# Altium PCB STM_System_Board.PCBDOC (part 10 of 16)
Units mm, origin at the board's own origin, x right, y up, seen from the top; angles counter-clockwise.
Board outline 222.53 x 100.01 mm, 6 copper layers (Top Layer, Int1 (GND), Int2 (Sign), Layer 1, Layer 2, Bottom Layer), stack 1.526 mm thick; 702 components, 774 nets, 3596 pads, 1988 vias.
Unrouted connection lines stored in the file: 1.
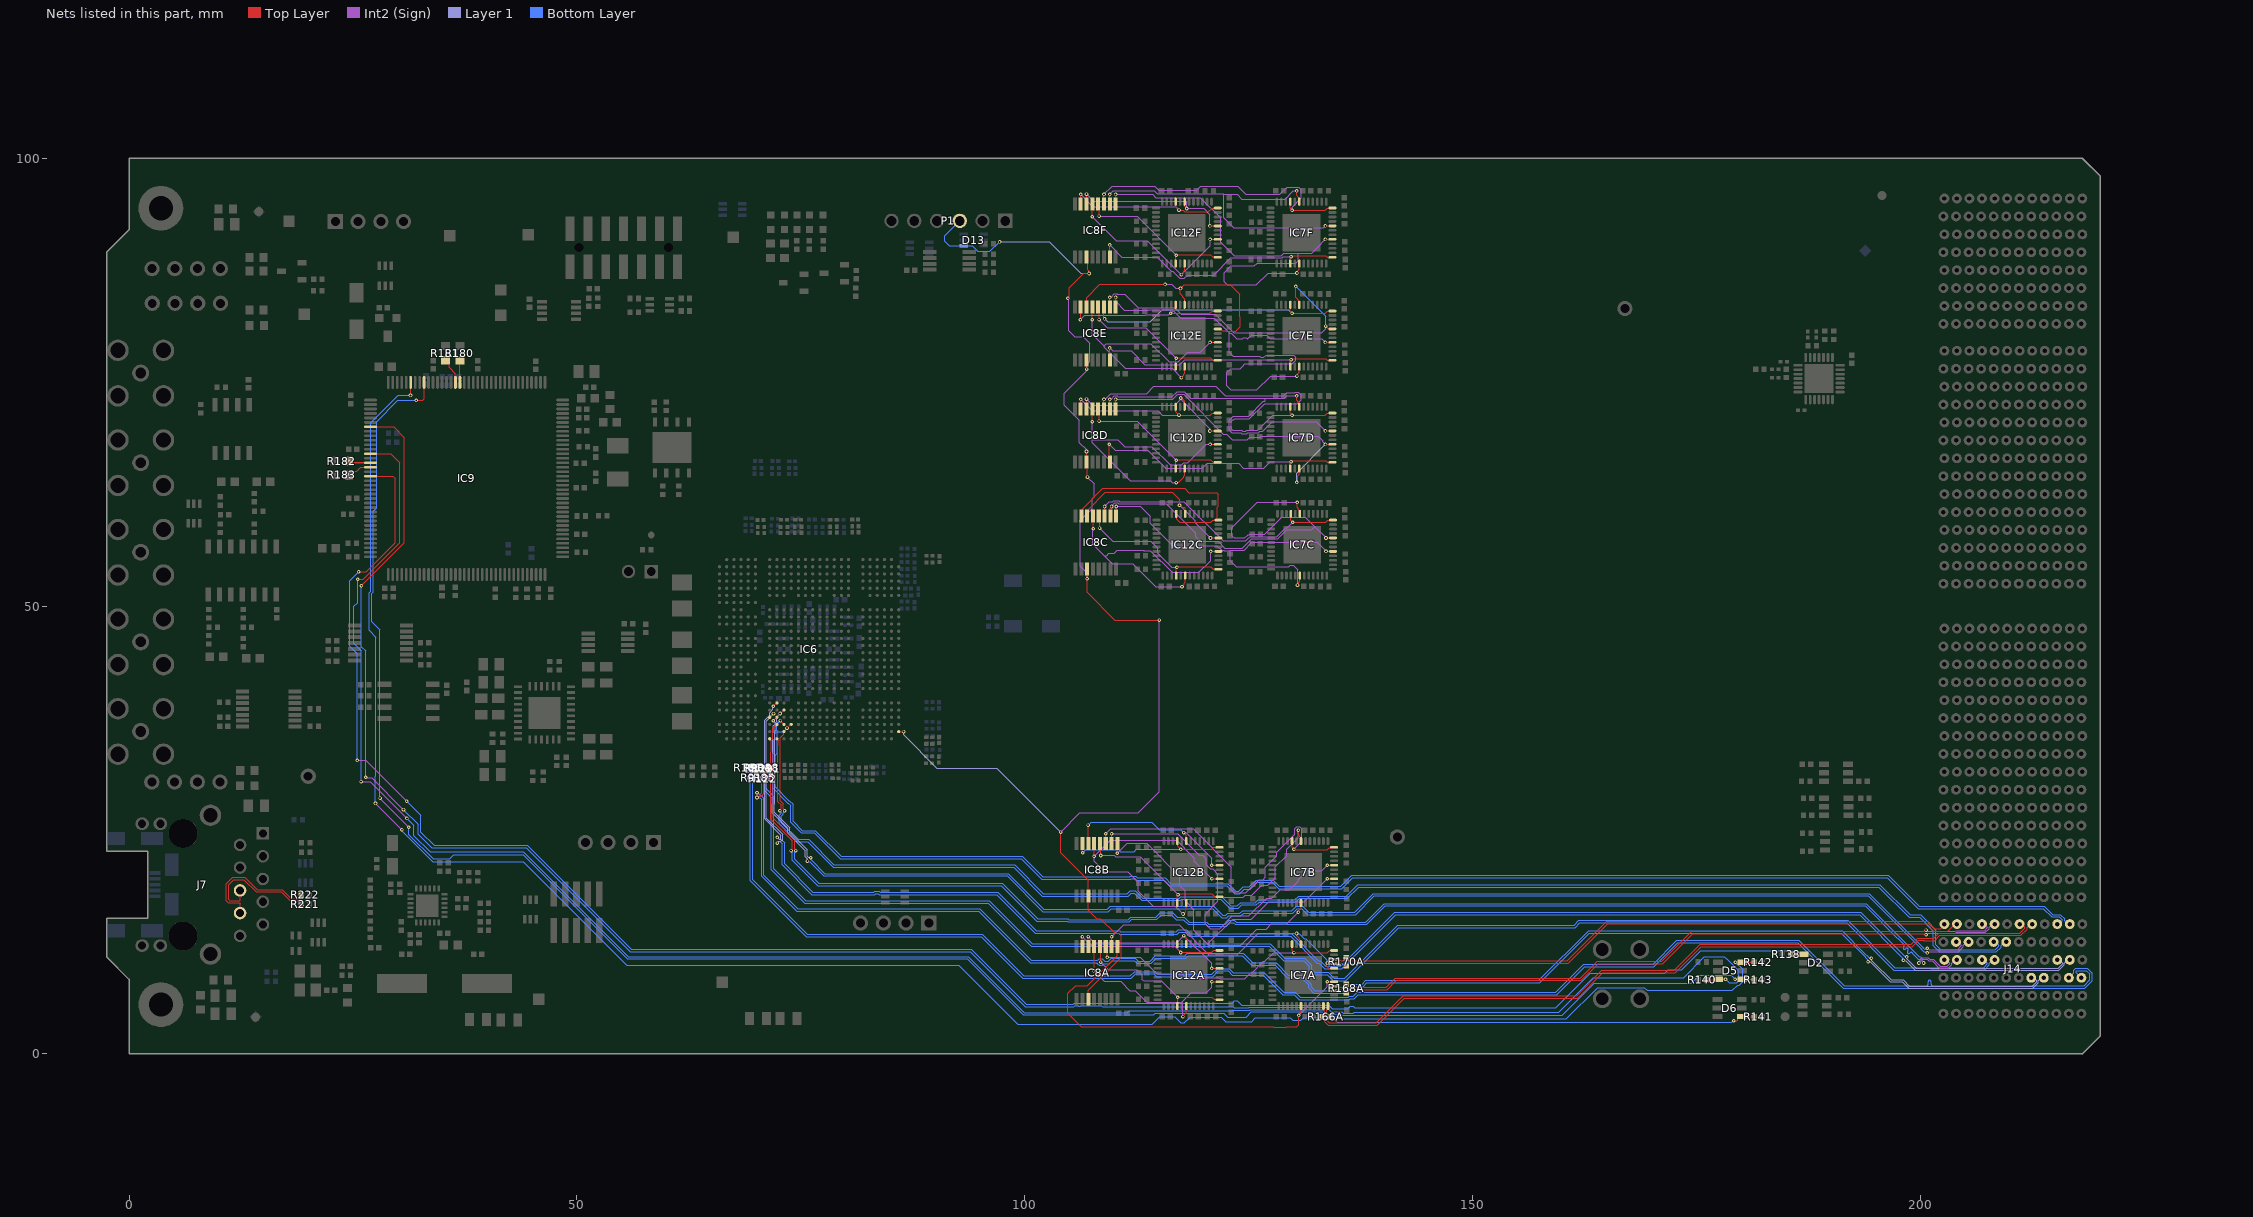
[diagram p13: the nets of this part, all layers, seen from the top]

## Via types
v1: diameter 0.4, hole 0.2, Top Layer to Bottom Layer, tented both sides, 1806 vias
v2: diameter 0.7, hole 0.4, Top Layer to Bottom Layer, tented both sides, 92 vias
v3: diameter 0.7, hole 0.4, Top Layer to Bottom Layer, 90 vias

## Nets (pads, with @x,y where several pads share a name; then routed paths per layer and width w, separated by ;. In a path a pad name is that pad's centre, name@x,y a point inside that pad or via, vN(x,y) a via of type N, cw(c..) or ccw(c..) an arc to the next point about the centre after c; other vN are vias at no path point) (continued)
R\E\_DE8D: IC7D.1 IC7D.40 IC8D.15 | length 29.6
  Top Layer w0.127: v1(109.427,68.048) 109.423,68.044 109.423,66.15 IC8D.15@109.479,66.094 ; IC7D.40@129.629,65.344 129.629,66.022 v1(129.715,66.108) 129.801,66.194 133.589,66.194 133.739,66.044 IC7D.1@134.329,66.044
  Int2 (Sign) w0.127: v1(109.427,68.048) 110.1,67.375 113.7,67.375 115.7,65.375 119.8,65.375 120.335,65.91 123.896,65.91 124.402,65.404 126.669,65.404 127.374,66.108 v1(129.715,66.108)
R\E\_DE8E: IC7E.1 IC7E.40 IC8E.15 | length 28.1
  Top Layer w0.127: IC8E.15@109.479,77.479 v1(109.479,78.808) ; IC7E.40@129.629,76.729 129.629,77.407 v1(129.715,77.493) 129.801,77.579 133.589,77.579 133.739,77.429 IC7E.1@134.329,77.429
  Int2 (Sign) w0.127: v1(109.479,78.808) 109.789,78.498 111.854,78.498 113.402,76.95 117.314,76.95 117.858,77.493 v1(129.715,77.493)
R\E\_DE8F: IC7F.1 IC7F.40 IC8F.15 | length 29.6
  Top Layer w0.127: IC8F.15@109.479,88.979 v1(109.479,90.308) ; IC7F.40@129.629,88.229 129.629,88.907 v1(129.715,88.993) 129.801,89.079 133.589,89.079 133.739,88.929 IC7F.1@134.329,88.929
  Int2 (Sign) w0.127: v1(109.479,90.308) 110.837,88.95 114.775,88.95 116.341,87.384 116.526,87.384 117.307,86.604 117.816,86.604 118.152,86.94 121.069,86.94 123,88.871 128.74,88.871 128.863,88.993 v1(129.715,88.993)
R\E\_DE9A: IC7A.5 IC7A.42 IC8A.1 | length 45.1
  Top Layer w0.127: IC8A.1@110.325,12.006 110.325,10.975 106.95,7.6 105.65,7.6 104.8,6.75 104.8,4.55 106.3,3.05 127.714,3.05 127.792,2.972 129.195,2.972 129.249,3.025 130.325,3.025 130.565,3.265 v1(130.565,4.298) 130.64,4.373 130.64,4.531 130.825,4.716 IC7A.42@130.825,5.356 ; v1(133.748,8.056) IC7A.5@134.525,8.056
  Int2 (Sign) w0.127: v1(130.565,4.298) 133.748,7.481 v1(133.748,8.056)
R\E\_DE9B: IC7B.5 IC7B.42 IC8B.1 | length 48.9
  Top Layer w0.127: v1(110.3,22.4) 110.325,22.425 IC8B.1@110.325,23.506 ; v1(130.536,15.827) 130.536,15.901 130.635,16 130.635,16.026 130.825,16.216 IC7B.42@130.825,16.856 ; v1(133.748,19.556) IC7B.5@134.525,19.556
  Int2 (Sign) w0.127: v1(110.3,22.4) 111.4,23.5 113.6,23.5 117.3,19.8 117.3,18.8 117.875,18.225 117.875,17.124 118.875,16.124 118.875,13.8 120.525,12.15 124.1,12.15 125.875,13.925 126.925,13.925 127.525,14.525 129.234,14.525 v1(130.536,15.827) ; 120.437,12.287 123.2,15.05 125.275,15.05 127.225,17 131.191,17 v1(133.748,19.556)
R\E\_DE9C: IC7C.5 IC7C.42 IC8C.1 | length 40.7
  Top Layer w0.127: IC8C.1@110.194,60.046 110.202,60.054 v1(110.202,61.113) ; v1(130.434,52.338) 130.509,52.413 130.509,52.571 130.694,52.756 IC7C.42@130.694,53.396 ; v1(133.617,56.096) IC7C.5@134.394,56.096
  Int2 (Sign) w0.127: v1(110.202,61.113) 112.877,61.113 113.995,59.995 113.995,59.233 116.484,56.744 121.431,56.744 121.95,56.225 122.181,56.225 122.235,56.171 122.855,56.171 122.9,56.216 ; v1(130.434,52.338) 130.434,54.059 129.942,54.551 129.618,54.551 129.442,54.375 123.6,54.375 122.9,55.075 122.9,56.216 ; v1(133.617,56.096) 132.618,57.095 125.35,57.095 124.471,56.216 122.9,56.216
R\E\_DE9D: IC7D.5 IC7D.42 IC8D.1 | length 35.4
  Top Layer w0.127: IC8D.1@110.129,71.994 v1(110.129,73.061) ; v1(130.35,63.8) 130.35,63.874 130.444,63.968 130.444,64.519 130.629,64.704 IC7D.42@130.629,65.344 ; v1(133.552,68.044) IC7D.5@134.329,68.044
  Int2 (Sign) w0.127: v1(110.129,73.061) 116.483,73.061 117.047,73.625 117.725,73.625 122.157,69.193 122.554,69.193 123.172,68.575 124.83,68.575 125.101,68.846 126.298,68.846 126.407,68.954 132.642,68.954 132.704,68.892 132.786,68.892 133.252,68.427 133.252,68.355 133.552,68.055 v1(133.552,68.044)
  Layer 1 w0.127: v1(130.35,63.8) 130.35,64.843 v1(133.552,68.044)
R\E\_DE9E: IC7E.5 IC7E.42 IC8E.1 | length 57.9
  Top Layer w0.127: IC8E.1@110.129,83.379 v1(110.129,84.446) ; v1(130.369,75.671) 130.444,75.746 130.444,75.904 130.629,76.089 IC7E.42@130.629,76.729 ; v1(133.552,79.429) IC7E.5@134.329,79.429
  Int2 (Sign) w0.127: v1(110.129,84.446) 110.129,84.025 111.114,83.039 113.774,83.039 113.8,83.066 116.459,83.066 117.374,82.151 121.152,82.151 122.802,80.502 ; v1(130.369,75.671) 127.421,75.671 125.9,74.15 123,74.15 122.55,74.6 122.55,76.075 122.975,76.5 124.05,76.5 124.309,76.76 124.309,76.792 124.538,77.021 124.571,77.021 124.604,77.054 129.828,77.054 130.225,77.451 130.225,77.775 130,78 126.923,78 126.673,77.751 126.35,77.751 126.213,77.887 123.325,77.887 123.263,77.887 122.802,78.348 122.802,80.502 ; v1(133.552,79.429) 133.131,79.85 127.413,79.85 127.01,80.254 125.306,80.254 124.902,79.85 124.804,79.85 124.714,79.941 124.39,79.941 124.3,79.85 123.641,79.85 123.063,80.428 122.875,80.428 122.802,80.502
R\E\_DE9F: IC7F.5 IC7F.42 IC8F.1 | length 51.1
  Top Layer w0.127: IC8F.1@110.129,94.879 v1(110.129,95.946) ; v1(130.369,87.171) 130.444,87.246 130.444,87.404 130.629,87.589 IC7F.42@130.629,88.229 ; v1(133.552,90.929) IC7F.5@134.329,90.929
  Int2 (Sign) w0.127: v1(110.129,95.946) 114.254,95.946 114.625,95.575 119.6,95.575 121.85,93.325 121.85,90.625 123.35,89.125 128.635,89.125 128.894,89.384 130.525,89.384 ; v1(130.369,87.171) 127.146,87.171 125.825,85.85 122.6,85.85 122.25,86.2 122.25,87.225 123,87.975 125.625,87.975 125.925,88.275 130.25,88.275 130.525,88.55 130.525,89.384 ; v1(133.552,90.929) 133.099,90.477 133.099,90.454 132.029,89.384 130.525,89.384
R\E\_DE10A: IC7A.8 IC7A.19 IC8A.2 | length 32.4
  Top Layer w0.127: IC8A.2@109.675,12.006 v1(109.675,13.073) ; v1(130.325,13.45) 130.356,13.419 130.356,13.182 130.579,12.959 ; 130.579,12.958 130.64,12.897 130.64,12.788 130.825,12.603 IC7A.19@130.825,12.256 ; v1(133.75,10.15) 133.75,10.076 133.625,9.951 133.625,9.825 133.894,9.556 IC7A.8@134.525,9.556
  Int2 (Sign) w0.127: v1(109.675,13.073) 111.036,14.434 117.216,14.434 120.55,11.1 123.725,11.1 126.075,13.45 v1(130.325,13.45)
  Bottom Layer w0.127: v1(130.325,13.45) 130.35,13.425 130.599,13.425 131.179,12.845 131.33,12.845 133.738,10.437 133.738,10.162 v1(133.75,10.15)
R\E\_DE10B: IC7B.8 IC7B.19 IC8B.2 | length 53.9
  Top Layer w0.127: IC8B.2@109.675,23.506 v1(109.675,24.573) ; v1(130.536,24.969) 130.536,24.501 130.64,24.397 130.64,24.288 130.825,24.103 IC7B.19@130.825,23.756 ; v1(133.748,21.056) IC7B.8@134.525,21.056
  Int2 (Sign) w0.127: v1(109.675,24.573) 117.048,24.573 119.44,22.182 119.828,22.182 120.261,21.749 120.261,21.095 120.693,20.663 120.959,20.663 121.55,20.072 121.55,17.5 ; v1(130.536,24.969) 130.536,24.136 129.225,22.825 129.225,22.15 127.95,20.875 127.95,19.675 127.125,18.85 126.45,18.85 125.297,17.697 124.598,17.697 124.401,17.5 121.55,17.5 ; v1(133.748,21.056) 133.116,20.425 131.467,20.425 130.494,19.452 130.494,19.294 129.512,18.312 128.487,18.312 127.575,17.4 126.975,17.4 125,15.425 123.15,15.425 121.725,14 120.675,14 120.125,14.55 120.125,15.6 121.55,17.025 121.55,17.5
R\E\_DE10C: IC7C.8 IC7C.19 IC8C.2 | length 51.4
  Top Layer w0.127: IC8C.2@109.544,60.046 109.544,60.913 109.675,61.044 v1(109.675,61.113) ; v1(130.405,61.566) 130.405,61.041 130.509,60.937 130.509,60.828 130.694,60.643 IC7C.19@130.694,60.296 ; v1(133.617,57.596) IC7C.8@134.394,57.596
  Int2 (Sign) w0.127: v1(109.675,61.113) 109.675,61.139 110.04,61.504 110.364,61.504 110.476,61.392 115.8,61.392 119.064,58.128 119.064,57.714 119.575,57.203 121.562,57.203 122.295,56.47 124.27,56.47 125.3,57.5 128.225,57.5 129.225,58.5 132,58.5 132.356,58.856 ; v1(130.405,61.566) 129.937,61.566 129.93,61.56 125.91,61.56 123.1,58.75 123.1,57.85 123.35,57.6 124.55,57.6 124.925,57.975 125.057,57.975 125.09,58.008 126.783,58.008 128.7,59.925 131.288,59.925 132.356,58.856 ; v1(133.617,57.596) 132.356,58.856
R\E\_DE10D: IC7D.8 IC7D.19 IC8D.2 | length 43.1
  Top Layer w0.127: IC8D.2@109.479,71.994 v1(109.479,73.061) ; v1(130.34,73.457) 130.34,72.989 130.444,72.885 130.444,72.776 130.629,72.591 IC7D.19@130.629,72.244 ; v1(133.552,69.544) IC7D.8@134.329,69.544
  Int2 (Sign) w0.127: v1(109.479,73.061) 109.553,73.061 109.653,73.162 109.677,73.162 109.967,73.452 110.291,73.452 110.393,73.35 116.413,73.35 116.988,73.925 117.784,73.925 118.509,73.2 126.85,73.2 ; v1(130.34,73.457) 129.228,73.457 128.971,73.2 126.85,73.2 ; v1(133.552,69.544) 132.521,70.575 127.625,70.575 126.55,69.5 126.234,69.5 126.088,69.354 124.89,69.354 124.767,69.231 124.233,69.231 124.11,69.354 123.111,69.354 122.796,69.669 122.796,70.725 123.271,71.2 124.965,71.2 126.619,72.854 126.776,72.854 126.85,72.928 126.85,73.2
R\E\_DE10E: IC7E.8 IC7E.19 IC8E.2 | length 36.5
  Top Layer w0.127: IC8E.2@109.479,83.379 v1(109.479,84.446) ; v1(130.226,85.674) 130.226,84.488 130.444,84.27 130.444,84.161 130.629,83.976 IC7E.19@130.629,83.629 ; v1(133.575,81.25) 133.862,80.963 134.296,80.963 IC7E.8@134.329,80.929
  Int2 (Sign) w0.127: v1(109.479,84.446) 109.553,84.446 109.653,84.547 109.677,84.547 109.967,84.837 110.291,84.837 110.328,84.8 111.175,84.8 112.655,83.32 116.094,83.32 116.705,83.32 117.45,82.575 121.275,82.575 123.325,80.525 133.147,80.525 133.574,80.952 v1@133.574,81.249
  Bottom Layer w0.127: v1(130.226,85.674) 130.662,85.238 130.662,85.23 130.891,85.001 130.899,85.001 133.575,82.325 v1(133.575,81.25)
R\E\_DE10F: IC7F.8 IC7F.19 IC8F.2 | length 39.4
  Top Layer w0.127: IC8F.2@109.479,94.879 v1(109.479,95.946) ; v1(130.34,96.342) 130.34,95.874 130.444,95.77 130.444,95.661 130.629,95.476 IC7F.19@130.629,95.129 ; v1(133.552,92.429) IC7F.8@134.329,92.429
  Int2 (Sign) w0.127: v1(109.479,95.946) 109.869,96.337 114.438,96.337 114.775,96 122.145,96 122.2,95.945 ; v1@130.266,96.342 129.967,96.342 129.05,95.425 124.2,95.425 123.68,95.945 122.2,95.945 ; v1(133.552,92.429) 133.52,92.429 133.337,92.246 123.304,92.246 122.2,93.35 122.2,95.945
R\E\_DE11A: IC7A.12 IC7A.21 IC8A.3 | length 30
  Top Layer w0.127: IC8A.3@109.025,12.006 109.186,11.845 109.186,10.789 v1(109.2,10.775) ; IC7A.21@129.825,12.256 129.825,11.511 v1(130.026,11.31) 133.734,11.31 133.947,11.523 134.492,11.523 IC7A.12@134.525,11.556
  Int2 (Sign) w0.127: v1(109.2,10.775) 112.875,10.775 114.7,8.95 117.575,8.95 118.025,8.5 121.6,8.5 121.725,8.375 124.526,8.375 125.126,8.975 125.25,8.975 126.629,10.354 126.802,10.354 127.758,11.31 v1(130.026,11.31)
R\E\_DE11B: IC7B.12 IC7B.21 IC8B.3 | length 40.2
  Top Layer w0.127: IC8B.3@109.025,23.506 v1(109.025,24.573) ; IC7B.21@129.825,23.756 129.825,23.011 129.98,22.857 v1(130.027,22.857) ; v1@130.027,22.81 133.734,22.81 133.947,23.023 134.492,23.023 IC7B.12@134.525,23.056
  Int2 (Sign) w0.127: v1(109.025,24.573) 109.579,25.127 118.773,25.127 123.05,20.85 123.05,18.4 123.475,17.975 124.675,17.975 126.171,19.471 126.584,19.471 126.813,19.7 126.813,20.813 128.1,22.1 128.1,22.5 130.146,24.546 130.146,25.131 130.375,25.36 130.698,25.36 130.927,25.131 130.927,23.757 v1(130.027,22.857)
R\E\_DE11C: IC7C.12 IC7C.21 IC8C.3 | length 30.7
  Top Layer w0.127: IC8C.3@108.894,60.046 v1(108.894,61.113) ; IC7C.21@129.694,60.296 129.694,59.551 v1(129.895,59.35) 133.603,59.35 133.816,59.563 134.361,59.563 IC7C.12@134.394,59.596
  Int2 (Sign) w0.127: v1(108.894,61.113) 109.427,61.646 109.823,61.646 109.935,61.758 110.469,61.758 110.581,61.646 117.75,61.646 122.121,57.275 124.65,57.275 124.975,57.6 125.041,57.6 125.195,57.754 128.12,57.754 129.12,58.754 129.3,58.754 v1(129.895,59.35)
R\E\_DE11D: IC7D.12 IC7D.21 IC8D.3 | length 47.8
  Top Layer w0.127: IC8D.3@108.829,71.994 v1(108.829,73.061) ; IC7D.21@129.629,72.244 129.629,71.499 v1(129.83,71.298) 133.538,71.298 133.751,71.511 134.296,71.511 IC7D.12@134.329,71.544
  Int2 (Sign) w0.127: v1(108.829,73.061) 108.903,73.061 109.003,73.162 109.027,73.162 109.571,73.706 113.581,73.706 114.4,74.525 121.3,74.525 122.35,73.475 128.887,73.475 129.212,73.8 130.131,73.8 130.179,73.848 130.502,73.848 130.825,73.525 130.825,73.025 130.4,72.6 126.75,72.6 125.066,70.916 123.413,70.916 123.295,70.797 123.228,70.797 123.05,70.62 123.05,69.774 123.217,69.608 124.215,69.608 124.338,69.485 124.662,69.485 124.785,69.608 125.983,69.608 127.673,71.298 v1(129.83,71.298)
R\E\_DE11E: IC7E.12 IC7E.21 IC8E.3 | length 28.8
  Top Layer w0.127: IC8E.3@108.829,83.379 108.829,82.195 108.9,82.124 v1(108.9,82.05) ; IC7E.21@129.629,83.629 129.629,82.884 v1(129.83,82.683) 133.538,82.683 133.751,82.896 134.296,82.896 IC7E.12@134.329,82.929
  Layer 1 w0.127: v1(108.9,82.05) 109.224,81.726 114.001,81.726 115.124,82.849 115.368,83.093 129.42,83.093 v1(129.83,82.683)
R\E\_DE11F: IC7F.12 IC7F.21 IC8F.3 | length 33
  Top Layer w0.127: IC8F.3@108.829,94.879 v1(108.829,95.946) ; IC7F.21@129.629,95.129 129.629,94.384 v1(129.83,94.183) 133.538,94.183 133.751,94.396 134.296,94.396 IC7F.12@134.329,94.429
  Int2 (Sign) w0.127: v1(108.829,95.946) 109.733,96.85 114.5,96.85 114.925,96.425 119.204,96.425 119.629,96.85 123.75,96.85 124.65,95.95 128.477,95.95 129.27,96.743 130.557,96.743 130.85,96.45 130.85,95.55 129.83,94.53 v1(129.83,94.183)
R\E\_DE12A: IC8A.4 IC12A.1 IC12A.40 | length 18.1
  Top Layer w0.127: IC8A.4@108.375,12.006 108.475,11.906 v1(108.475,10.25) ; IC12A.40@117.025,5.356 117.042,5.373 117.042,6.305 v1(117.059,6.322) ; v1@117.1,6.281 117.174,6.356 120.876,6.356 121.142,6.09 121.692,6.09 IC12A.1@121.725,6.056
  Int2 (Sign) w0.127: v1(108.475,10.25) 109.325,9.4 112.5,9.4 113.125,8.775 113.125,8.278 113.25,8.153 115.227,8.153 v1(117.059,6.322)
R\E\_DE12B: IC8B.4 IC12B.1 IC12B.40 | length 17.6
  Top Layer w0.127: IC8B.4@108.375,23.506 108.475,23.406 v1(108.475,22.156) ; IC12B.40@117.025,16.856 117.025,17.706 v1(117.1,17.781) 117.174,17.856 120.876,17.856 121.142,17.59 121.692,17.59 IC12B.1@121.725,17.556
  Int2 (Sign) w0.127: v1(108.475,22.156) 109.991,22.156 110.138,22.01 112.871,22.01 v1(117.1,17.781)
R\E\_DE12C: IC8C.4 IC12C.1 IC12C.40 | length 17.9
  Top Layer w0.127: IC8C.4@108.244,60.046 108.344,59.946 v1(108.344,58.696) ; IC12C.40@116.894,53.396 116.894,54.246 v1(116.969,54.321) 117.043,54.396 120.745,54.396 121.011,54.129 121.561,54.129 IC12C.1@121.594,54.096
  Int2 (Sign) w0.127: v1(108.344,58.696) 109.803,57.237 114.053,57.237 114.842,56.448 114.842,55.871 116.392,54.321 v1(116.969,54.321)
R\E\_DE12D: IC8D.4 IC12D.1 IC12D.40 | length 17.6
  Top Layer w0.127: IC8D.4@108.179,71.994 108.279,71.894 v1(108.279,70.644) ; IC12D.40@116.829,65.344 116.829,66.194 v1(116.904,66.269) 116.978,66.344 120.68,66.344 120.946,66.078 121.496,66.078 IC12D.1@121.529,66.044
  Int2 (Sign) w0.127: v1(108.279,70.644) 112.528,70.644 v1(116.904,66.269)
R\E\_DE12E: IC8E.4 IC12E.1 IC12E.40 | length 17.6
  Top Layer w0.127: IC8E.4@108.179,83.379 108.279,83.279 v1(108.279,81.978) ; IC12E.40@116.829,76.729 116.829,77.579 v1(116.904,77.654) 116.978,77.729 120.68,77.729 120.946,77.463 121.496,77.463 IC12E.1@121.529,77.429
  Int2 (Sign) w0.127: v1(108.279,81.978) 109.207,81.05 113.508,81.05 v1(116.904,77.654)
R\E\_DE12F: IC8F.4 IC12F.1 IC12F.40 | length 17.6
  Top Layer w0.127: IC8F.4@108.179,94.879 108.279,94.779 v1(108.279,93.529) ; IC12F.40@116.829,88.229 116.862,88.263 116.862,89.103 v1(116.904,89.145) ; v1@116.904,89.154 116.978,89.229 120.68,89.229 120.946,88.963 121.496,88.963 IC12F.1@121.529,88.929
  Int2 (Sign) w0.127: v1(108.279,93.529) 112.528,93.529 116.904,89.154 v1(116.904,89.145)
R\E\_DE13A: IC8A.5 IC12A.5 IC12A.42 | length 22.6
  Top Layer w0.127: v1(107.675,9.275) 107.725,9.325 IC8A.5@107.725,12.006 ; v1(117.645,4.166) 117.645,4.216 118.025,4.596 IC12A.42@118.025,5.356 ; v1(120.876,8.056) IC12A.5@121.725,8.056
  Int2 (Sign) w0.127: v1(107.675,9.275) 108.85,8.1 110.675,8.1 111.725,7.05 112.33,7.05 113.614,5.766 117.5,5.766 ; v1(117.645,4.166) 117.645,5.621 117.5,5.766 ; v1(120.876,8.056) 120.876,7.439 120.269,6.833 118.567,6.833 117.5,5.766
R\E\_DE13B: IC8B.5 IC12B.5 IC12B.42 | length 33.1
  Top Layer w0.127: v1(107.725,22.067) IC8B.5@107.725,23.506 ; v1(117.665,15.621) 117.935,15.891 117.935,16.006 118.025,16.096 IC12B.42@118.025,16.856 ; v1(120.876,19.556) IC12B.5@121.725,19.556
  Int2 (Sign) w0.127: v1(117.665,15.621) 116.776,16.51 114.315,16.51 112.675,18.15 112.675,19.15 111.475,20.35 108.9,20.35 107.725,21.525 v1(107.725,22.067) 109.508,23.85 116.933,23.85 117.788,22.995 117.788,22.987 118.925,21.85 118.925,21.507 v1(120.876,19.556)
R\E\_DE13C: IC8C.5 IC12C.5 IC12C.42 | length 32
  Top Layer w0.127: IC8C.5@107.594,60.046 107.629,60.011 v1(107.629,58.621) ; v1(117.534,52.161) 117.804,52.431 117.804,52.546 117.894,52.636 IC12C.42@117.894,53.396 ; v1(120.745,56.096) IC12C.5@121.594,56.096
  Int2 (Sign) w0.127: v1(107.629,58.621) 107.594,58.586 107.594,56.872 108.871,55.596 ; v1(117.534,52.161) 114.59,52.161 112.014,54.737 109.729,54.737 108.871,55.596 ; v1(120.745,56.096) 120.745,55.07 119.425,53.75 116.45,53.75 114.007,56.193 113.272,56.193 113.266,56.199 110.324,56.199 109.99,55.865 109.382,55.865 109.113,55.596 108.871,55.596
R\E\_DE13D: IC8D.5 IC12D.5 IC12D.42 | length 33.2
  Top Layer w0.127: v1(107.529,70.569) IC8D.5@107.529,71.994 ; v1(116.9,63.775) 116.932,63.807 117.167,63.807 117.739,64.379 117.739,64.494 117.829,64.584 IC12D.42@117.829,65.344 ; v1(120.68,68.044) IC12D.5@121.529,68.044
  Int2 (Sign) w0.127: v1(107.529,70.569) 107.529,68.55 ; v1(116.9,63.775) 116.432,63.775 116.216,63.991 111.777,63.991 107.529,68.239 107.529,68.55 ; v1(120.68,68.044) 120.24,68.044 118.17,65.975 117.729,65.975 117.504,65.75 116.225,65.75 114.175,67.8 111.15,67.8 110.375,68.575 107.554,68.575 107.529,68.55
R\E\_DE13E: IC8E.5 IC12E.5 IC12E.42 | length 31
  Top Layer w0.127: v1(107.529,81.954) IC8E.5@107.529,83.379 ; v1(117.469,75.494) 117.739,75.764 117.739,75.879 117.829,75.969 IC12E.42@117.829,76.729 ; v1(120.68,79.429) IC12E.5@121.529,79.429
  Int2 (Sign) w0.127: v1(107.529,81.954) 107.529,80.342 108.848,79.022 108.848,78.886 111.201,76.533 116.43,76.533 v1(117.469,75.494) ; 108.835,79.035 109.1,79.3 114.05,79.3 116.1,77.25 117.1,77.25 118.2,78.35 119.6,78.35 v1(120.68,79.429)
R\E\_DE13F: IC8F.5 IC12F.5 IC12F.42 | length 21.5
  Top Layer w0.127: v1(107.529,93.454) IC8F.5@107.529,94.879 ; v1(117.469,86.994) 117.739,87.264 117.739,87.379 117.829,87.469 IC12F.42@117.829,88.229 ; v1(120.68,90.929) IC12F.5@121.529,90.929
  Int2 (Sign) w0.127: v1(107.529,93.454) 110.205,90.779 113.685,90.779 v1(117.469,86.994) 120.68,90.205 v1(120.68,90.929)
R\E\_DE14A: IC8A.6 IC12A.8 IC12A.19 | length 19.3
  Top Layer w0.127: IC8A.6@107.075,12.006 v1(107.075,13.097) ; v1(117.74,13.215) 117.74,13.182 118.025,12.897 IC12A.19@118.025,12.256 ; v1(120.854,9.554) 120.873,9.554 120.876,9.556 IC12A.8@121.725,9.556
  Int2 (Sign) w0.127: v1(107.075,13.097) 107.747,12.425 116.949,12.425 v1(117.74,13.215) 120.854,10.101 v1(120.854,9.554)
R\E\_DE14B: IC8B.6 IC12B.8 IC12B.19 | length 20.4
  Top Layer w0.127: v1(107.05,25.55) 107.075,25.525 IC8B.6@107.075,23.506 ; v1(117.74,24.71) 117.74,24.682 118.025,24.397 IC12B.19@118.025,23.756 ; v1(120.854,21.054) 120.873,21.054 120.876,21.056 IC12B.8@121.725,21.056
  Int2 (Sign) w0.127: v1(117.74,24.71) 117.764,24.686 118.014,24.686 120.854,21.846 v1(120.854,21.054)
  Bottom Layer w0.127: v1(107.05,25.55) 107.124,25.55 107.424,25.85 114.175,25.85 115,25.025 117.404,25.025 117.719,24.71 v1(117.74,24.71)
R\E\_DE14C: IC8C.6 IC12C.8 IC12C.19 | length 20.1
  Top Layer w0.127: IC8C.6@106.944,60.046 107.105,60.208 107.105,60.83 108.975,62.7 116.45,62.7 117.261,61.889 v1(117.261,61.255) 117.335,61.255 117.563,61.027 117.804,61.027 117.894,60.937 IC12C.19@117.894,60.296 ; v1(120.723,57.594) 120.742,57.594 120.745,57.596 IC12C.8@121.594,57.596
  Int2 (Sign) w0.127: v1(117.261,61.255) 119.011,59.506 119.011,59.306 v1(120.723,57.594)
R\E\_DE14D: IC8D.6 IC12D.8 IC12D.19 | length 19.5
  Top Layer w0.127: IC8D.6@106.879,71.994 v1(106.879,73.094) ; v1(117.4,73.225) 117.474,73.225 117.579,73.12 117.594,73.12 117.829,72.885 IC12D.19@117.829,72.244 ; v1(120.658,69.542) 120.677,69.542 120.68,69.544 IC12D.8@121.529,69.544
  Int2 (Sign) w0.127: v1(106.879,73.094) 107.573,72.4 116.74,72.4 117.348,73.007 117.348,73.173 v1(117.4,73.225) 117.4,73.158 117.544,73.014 117.544,72.905 120.634,69.815 120.634,69.566 v1(120.658,69.542)
R\E\_DE14E: IC8E.6 IC12E.8 IC12E.19 | length 28
  Top Layer w0.127: IC8E.6@106.879,83.379 106.879,84.4 108.379,85.9 v1(115.65,85.9) ; IC12E.19@117.829,83.629 117.829,84.27 117.64,84.459 117.64,84.576 117.332,84.884 117.332,85.407 v1(117.375,85.45) 117.775,85.85 122.925,85.85 124,84.775 124,82.29 124.014,82.276 124.014,81.171 123.539,80.696 122.443,80.696 122.392,80.747 121.993,80.747 121.81,80.929 IC12E.8@121.529,80.929
  Int2 (Sign) w0.127: v1(115.65,85.9) 116.375,85.9 116.825,85.45 v1(117.375,85.45)
R\E\_DE14F: IC8F.6 IC12F.8 IC12F.19 | length 19.2
  Top Layer w0.127: IC8F.6@106.879,94.879 v1(106.879,95.979) ; IC12F.19@117.829,95.129 117.839,95.12 117.839,94.611 v1(118.075,94.375) ; v1(120.658,92.427) 120.677,92.427 120.68,92.429 IC12F.8@121.529,92.429
  Int2 (Sign) w0.127: v1(106.879,95.979) 107.683,95.175 118.001,95.175 118.075,95.101 v1(118.075,94.375) 119.95,94.375 120.658,93.667 v1(120.658,92.427)
R\E\_DE15A: IC8A.7 IC12A.12 IC12A.21 | length 18.3
  Top Layer w0.127: IC8A.7@106.425,12.006 v1(106.425,13.073) ; IC12A.21@117.025,12.256 117.058,12.223 117.058,11.673 v1(117.402,11.328) 120.876,11.328 121.104,11.556 IC12A.12@121.725,11.556
  Int2 (Sign) w0.127: v1(106.425,13.073) 107.498,12 116.731,12 v1(117.402,11.328)
R\E\_DE15B: IC8B.7 IC12B.12 IC12B.21 | length 17.8
  Top Layer w0.127: IC8B.7@106.425,23.506 106.425,22.475 v1(106.45,22.45) ; IC12B.21@117.025,23.756 117.058,23.723 117.058,23.173 v1(117.397,22.834) 117.402,22.828 120.876,22.828 121.104,23.056 IC12B.12@121.725,23.056
  Bottom Layer w0.127: v1(106.45,22.45) 106.791,22.791 110.462,22.791 110.664,22.588 112.212,22.588 112.457,22.834 v1(117.397,22.834)
R\E\_DE15C: IC8C.7 IC12C.12 IC12C.21 | length 25.7
  Top Layer w0.127: IC8C.7@106.294,60.046 106.44,60.193 106.44,60.865 108.7,63.125 117.825,63.125 118.3,62.65 121.426,62.65 121.598,62.478 121.598,61.132 121.5,61.034 121.5,59.676 121.58,59.596 IC12C.12@121.594,59.596 120.973,59.596 120.745,59.368 117.271,59.368 116.927,59.713 116.927,60.263 IC12C.21@116.894,60.296
R\E\_DE15D: IC8D.7 IC12D.12 IC12D.21 | length 18.3
  Top Layer w0.127: IC8D.7@106.229,71.994 v1(106.229,73.061) ; IC12D.21@116.829,72.244 116.862,72.211 116.862,71.661 v1(117.206,71.316) 120.68,71.316 120.908,71.544 IC12D.12@121.529,71.544
  Int2 (Sign) w0.127: v1(106.229,73.061) 107.515,71.775 114.9,71.775 115.359,71.316 v1(117.206,71.316)
R\E\_DE15E: IC8E.7 IC12E.12 IC12E.21 | length 18.4
  Top Layer w0.127: v1(106.2,81.95) 106.229,81.979 IC8E.7@106.229,83.379 ; IC12E.21@116.829,83.629 116.796,83.596 116.796,83.196 v1(116.275,82.675) 120.653,82.675 120.908,82.929 IC12E.12@121.529,82.929
  Int2 (Sign) w0.127: v1(106.2,81.95) 106.691,82.441 113.381,82.441 113.415,82.475 113.45,82.475 113.482,82.507 116.033,82.507 116.201,82.675 v1(116.275,82.675)
R\E\_DE15F: IC8F.7 IC12F.12 IC12F.21 | length 18.4
  Top Layer w0.127: IC8F.7@106.229,94.879 v1(106.229,95.946) ; IC12F.21@116.829,95.129 116.862,95.096 116.862,94.546 v1(117.206,94.201) 117.65,94.201 117.867,93.985 120.463,93.985 120.908,94.429 IC12F.12@121.529,94.429
  Int2 (Sign) w0.127: v1(106.229,95.946) 107.6,94.575 116.833,94.575 v1(117.206,94.201)
RD_N: J7.3 R222.2 | length 14.5
  Top Layer w0.095: J7.3@12.39,15.72 12.39,16.801 12.334,16.857 11.364,16.857 11.092,16.857 10.865,17.084 10.865,18.98 11.593,19.708 12.942,19.708 14.3,18.35 17.126,18.35 18.125,17.351 18.917,17.351 18.973,17.407 18.973,17.502 R222.2@19.215,17.744
RD_P: J7.5 R221.2 | length 13.6
  Top Layer w0.095: J7.5@12.39,18.26 12.39,17.179 12.334,17.124 11.253,17.124 11.203,17.124 11.132,17.195 11.132,18.869 11.704,19.441 12.832,19.441 14.189,18.083 17.016,18.083 18.015,17.084 18.917,17.084 18.973,17.029 18.973,16.933 R221.2@19.215,16.691
REV_ID0: IC9.56 R180.1 | length 2.5
  Top Layer w0.127: IC9.56@36.935,74.971 R180.1@36.935,77.432
REV_ID1: IC9.57 R181.1 | length 3
  Top Layer w0.127: R181.1@35.306,77.432 35.356,77.432 35.743,77.045 35.743,76.637 36.435,75.945 IC9.57@36.435,74.971
REV_ID2: IC9.87 R182.1 | length 2.5
  Top Layer w0.203: R182.1@24.549,66.167 24.72,65.996 IC9.87@26.96,65.996
REV_ID3: IC9.88 R183.1 | length 2.8
  Top Layer w0.127: R183.1@24.549,64.643 24.93,65.024 25.4,65.024 25.872,65.496 IC9.88@26.96,65.496
SCK: D13.4 IC6.A25 IC8A.11 IC8B.11 IC8C.11 IC8D.11 IC8E.11 IC8F.11 P1.3 | length 155
  Top Layer w0.127: IC6.A25@85.915,35.984 v1(86.466,35.984) ; v1(104.013,24.765) 104.013,22.479 107.075,19.417 IC8B.11@107.075,17.606 107.075,16.054 108.029,15.1 108.425,15.1 110.061,13.464 110.487,13.464 110.74,13.21 110.74,10.776 107.075,7.11 IC8A.11@107.075,6.106 ; v1(104.798,84.35) 104.798,84.424 104.934,84.56 104.934,85.509 106.547,87.122 v1(107.163,87.122) ; v1(106.879,67.254) IC8D.11@106.879,66.094 106.985,65.989 v1(106.985,64.389) ; IC8E.11@106.879,77.479 106.9,77.458 v1(106.9,76.45) ; IC8F.11@106.879,88.979 107.04,88.818 107.04,87.559 107.118,87.481 v1@107.118,87.271 ; IC8C.11@106.944,54.146 v1(106.944,53.052) 106.944,51.531 110.05,48.425 v1(115,48.425)
  Int2 (Sign) w0.127: v1(104.013,24.765) 106.151,26.903 112.653,26.903 115,29.25 v1(115,48.425) ; 104.875,84.139 104.875,80.725 105.55,80.05 106.525,80.05 107.24,79.334 107.24,77.34 106.9,77 v1(106.9,76.45) 106.848,76.398 106.848,76.223 104.4,73.775 104.4,72.4 106.05,70.75 106.05,68.25 106.827,67.473 106.827,67.306 v1(106.879,67.254) ; v1(106.944,53.052) 106.944,53.66 106.172,54.432 106.172,59.563 107.493,60.884 107.493,61.951 107.721,62.179 107.721,63.652 v1(106.985,64.389)
  Layer 1 w0.127: v1(86.466,35.984) 86.466,35.609 90.175,31.9 96.878,31.9 v1(104.013,24.765) ; v1(97.175,90.65) 102.7,90.65 106.228,87.122 v1(107.163,87.122)
  Bottom Layer w0.127: P1.3@92.735,92.992 91.05,91.307 91.05,90.725 91.575,90.2 D13.4@93.2,90.2 94.125,90.2 94.75,89.575 96.1,89.575 v1(97.175,90.65)
SHARED_BUS_0: D6.1 IC9.67 R141.1 | length 216.3
  Top Layer w0.127: v1(31.42,73.508) 31.428,73.515 31.428,74.964 IC9.67@31.435,74.971 ; v1(179.125,3.7) 179.481,3.7 179.555,3.774 179.555,3.939 179.792,4.175 D6.1@180.02,4.175 180.027,4.168 R141.1@181.403,4.168
  Int2 (Sign) w0.127: v1(27.508,27.965) v1(30.455,25.019)
  Bottom Layer w0.127: v1(27.508,27.965) 27.508,30.999 27.563,31.054 27.563,46.504 26.797,47.269 26.797,51.464 27,51.667 27,70.434 30.074,73.508 v1(31.42,73.508) ; v1(30.455,25.019) 30.455,24.892 33.909,21.438 43.993,21.438 55.55,9.881 92.634,9.881 99.187,3.327 114.198,3.327 115.037,4.166 116.713,4.166 117.399,3.48 117.805,3.48 118.44,4.115 121.895,4.115 122.403,3.607 125.298,3.607 125.73,4.039 129.616,4.039 129.896,3.759 130.81,3.759 131.115,4.064 132.766,4.064 132.893,3.937 134.468,3.937 134.849,3.556 178.914,3.556 179.058,3.7 v1(179.125,3.7)
SHARED_BUS_1: D2.1 IC9.90 R138.1 | length 215.2
  Top Layer w0.127: v1(25.629,53.823) 26.469,53.823 29.693,57.047 29.693,64.237 29.433,64.496 IC9.90@26.96,64.496 ; R138.1@185.458,11.141 v1(186.08,11.141) D2.1@186.94,11.141
  Int2 (Sign) w0.127: v1(25.476,32.766) 26.441,32.766 v1(30.988,28.219)
  Bottom Layer w0.127: v1(25.476,32.766) 25.476,44.653 24.638,45.491 24.638,52.832 v1(25.629,53.823) ; v1(30.988,28.219) 32.588,26.619 32.588,24.765 34.052,23.301 44.44,23.301 56.048,11.694 94.021,11.694 100.143,5.572 105.423,5.572 105.508,5.657 106.042,5.657 106.1,5.599 106.158,5.657 123.123,5.657 123.388,5.922 123.712,5.922 124.218,5.416 124.922,5.416 124.956,5.451 133.894,5.451 134.29,5.055 136.063,5.055 136.338,5.33 136.662,5.33 136.816,5.175 159.25,5.175 163.109,9.034 171.416,9.034 171.806,9.423 173.33,9.423 175.438,11.532 185.69,11.532 v1(186.08,11.141)
SHARED_BUS_2: D5.6 IC9.79 R140.1 | length 217.6
  Top Layer w0.127: v1(25.933,52.273) 30.734,57.074 30.734,68.783 29.521,69.996 IC9.79@26.96,69.996 ; R140.1@176.104,8.284 177.334,8.284 D5.6@177.384,8.334 v1(178.21,8.334)
  Int2 (Sign) w0.127: v1(26.416,30.886) 26.465,30.838 27.074,30.838 v1(30.632,27.28)
  Bottom Layer w0.127: v1(25.933,52.273) 25.933,45.466 26.416,44.983 v1(26.416,30.886) ; v1(30.632,27.28) 32.258,25.654 32.258,24.536 33.798,22.997 44.314,22.997 55.922,11.389 93.895,11.389 100.016,5.267 105.478,5.267 105.613,5.403 105.937,5.403 105.995,5.345 106.205,5.345 106.263,5.403 108.537,5.403 108.672,5.267 123.262,5.267 123.388,5.141 125.006,5.141 125.062,5.197 133.717,5.197 134.214,4.699 135.363,4.699 135.513,4.549 136.662,4.549 136.763,4.65 159.575,4.65 163.45,8.525 173.523,8.525 175.844,10.846 178.079,10.846 178.3,10.625 178.322,10.625 179.603,9.344 179.603,8.876 179.68,8.799 179.68,8.187 179.437,7.944 178.601,7.944 v1(178.21,8.334)
SHARED_BUS_3: D5.3 IC9.64 R142.1 | length 221.2
  Top Layer w0.127: v1(32.055,72.949) 32.766,72.949 32.935,73.118 IC9.64@32.935,74.971 ; v1(179.307,10.234) D5.3@180.084,10.234 181.303,10.234 181.353,10.284 R142.1@181.403,10.234
  Int2 (Sign) w0.127: v1(28.022,28.556) 28.022,28.494 v1(31.217,25.299)
  Bottom Layer w0.127: v1(28.022,28.556) 27.991,28.587 27.991,47.371 27.102,48.26 27.102,51.41 27.254,51.562 27.254,60.579 27.661,60.985 27.661,70.587 30.023,72.949 v1(32.055,72.949) ; v1(31.217,25.299) 31.217,24.489 33.938,21.768 35.809,21.768 36.266,22.225 43.995,22.225 55.602,10.617 93.575,10.617 99.825,4.368 114.387,4.368 114.576,4.557 122.215,4.557 122.666,4.105 124.689,4.105 125.272,4.689 133.134,4.689 133.631,4.191 135.152,4.191 135.418,3.925 160.452,3.925 163.926,7.399 169.153,7.399 169.453,7.1 178.952,7.1 179.548,7.696 179.73,7.696 180.111,8.077 180.111,9.43 v1(179.307,10.234)
SHARED_BUS_4: D5.1 IC9.85 R143.1 | length 211.4
  Top Layer w0.127: v1(25.527,52.984) 26.137,52.984 30.201,57.048 30.201,66.015 29.219,66.996 IC9.85@26.96,66.996 ; v1(179.275,8.334) D5.1@180.084,8.334 181.353,8.334 R143.1@181.403,8.284
  Int2 (Sign) w0.127: v1(25.908,30.404) 26.899,30.404 v1(31.013,26.289)
  Bottom Layer w0.127: v1(25.527,52.984) 25.527,50.394 25.095,49.962 25.095,45.847 25.908,45.034 v1(25.908,30.404) ; v1(31.013,26.289) 31.775,25.527 31.775,24.384 33.611,22.549 44.03,22.549 55.708,10.871 93.681,10.871 99.93,4.622 111.44,4.622 111.629,4.811 123.139,4.811 123.216,4.887 125.111,4.887 125.167,4.943 133.239,4.943 133.736,4.445 135.258,4.445 135.408,4.295 159.97,4.295 163.575,7.9 174.375,7.9 175.263,8.788 178.821,8.788 v1(179.275,8.334)
SLOT1.LVDS_0_N: J14.B3 R91.1 R101.2 | length 178.1
  Bottom Layer w0.095: R101.2@69.099,31.609 69.099,31.589 69.261,31.426 69.291,31.426 69.346,31.371 69.346,31.004 R91.1@69.184,30.841 ; R91.1@69.167,30.841 R91.1@69.184,30.841 ; J14.B3@216.539,8.5 217.105,9.067 217.105,9.355 217.317,9.567 218.611,9.567 219.142,9.036 219.142,8.164 218.336,7.358 191.339,7.358 186.298,12.4 172.875,12.4 170.225,9.75 162.5,9.75 159.383,6.633 137.197,6.633 136.745,6.181 136.332,6.181 136.21,6.058 130.642,6.058 130.067,6.633 128.767,6.633 126.596,8.804 123.134,8.804 122.677,9.261 121.611,9.261 120.958,8.608 114.699,8.608 114.377,8.931 112.356,8.931 111.883,8.458 99.764,8.458 95.148,13.075 75.598,13.075 69.363,19.309 69.363,30.623 69.349,30.637 69.349,30.679 69.187,30.841 R91.1@69.184,30.841
SLOT1.LVDS_0_P: J14.A3 R90.2 R91.2 | length 177.3
  Bottom Layer w0.095: R91.2@69.827,30.841 R91.2@69.807,30.841 ; R90.2@69.861,31.609 69.861,31.589 69.698,31.426 69.669,31.426 69.613,31.37 69.613,31.035 R91.2@69.807,30.841 ; J14.A3@217.939,8.5 217.372,9.067 217.372,9.244 217.428,9.3 218.5,9.3 218.875,8.925 218.875,8.275 218.225,7.625 202.375,7.625 201.328,7.625 cw(c201.328,7.792) 201.162,7.792 201.162,8.053 ccw(c200.995,8.053) 200.995,8.219 ccw(c200.995,8.053) 200.829,8.053 200.829,7.792 cw(c200.662,7.792) 200.662,7.625 199.625,7.625 191.45,7.625 186.408,12.667 172.764,12.667 170.114,10.017 162.389,10.017 159.273,6.9 137.087,6.9 136.635,6.448 136.222,6.448 136.099,6.325 130.752,6.325 130.177,6.9 128.877,6.9 126.706,9.071 123.245,9.071 122.788,9.528 121.501,9.528 120.848,8.875 114.81,8.875 114.487,9.198 112.245,9.198 111.773,8.725 99.875,8.725 95.259,13.341 75.709,13.341 69.63,19.42 69.63,30.623 69.644,30.637 69.644,30.679 R91.2@69.807,30.841
SLOT1.LVDS_1_N: J14.E3 R122.1 R129.2 | length 168.1
  Top Layer w0.095: v1(70.1,29.152) 70.177,29.152 70.308,29.021 70.499,29.021 70.61,29.132 70.61,30.501 70.596,30.515 70.596,30.556 R122.1@70.433,30.719 ; R129.2@70.387,31.532 70.387,31.512 70.55,31.35 70.579,31.35 70.635,31.294 70.635,30.921 R122.1@70.433,30.719 ; R122.1@70.413,30.719 R122.1@70.433,30.719
  Layer 1 w0.102: v1(194.499,10.674) 194.536,10.638 194.536,10.416 194.711,10.242 196.69,8.263 198.037,8.263 198.725,7.575 212.443,7.575 212.932,8.064 212.932,8.148 212.58,8.5 J14.E3@212.339,8.5
  Bottom Layer w0.095: v1(70.1,29.152) 70.163,29.152 70.374,28.941 70.461,28.941 70.875,28.527 70.875,19.95 74.642,16.183 94.967,16.183 100.704,10.446 108.141,10.446 108.32,10.624 108.63,10.624 108.85,10.405 108.85,10.386 108.905,10.33 109.285,10.33 109.621,10.666 112.338,10.666 112.635,10.369 113.995,10.369 114.568,10.942 117.839,10.942 118.114,11.217 124.358,11.217 125.408,10.167 128.033,10.167 129.4,8.8 130.975,8.8 131.967,7.808 131.967,7.475 132.38,7.062 135.485,7.062 136.214,7.792 137.642,7.792 138.075,8.225 157.373,8.225 162.915,13.767 191.223,13.767 193.611,11.379 194.26,10.73 194.444,10.73 v1(194.499,10.674)
SLOT1.LVDS_1_P: J14.D3 R121.2 R122.2 | length 168.8
  Top Layer w0.095: v1(70.099,28.624) 70.176,28.624 70.307,28.754 70.609,28.754 70.876,29.022 70.876,30.501 70.891,30.515 70.891,30.556 71.053,30.719 R122.2@71.064,30.719 ; R122.2@71.073,30.719 R122.2@71.064,30.719 ; R121.2@71.149,31.532 71.149,31.512 70.987,31.35 70.957,31.35 70.902,31.294 70.902,30.881 R122.2@71.064,30.719
  Layer 1 w0.102: v1(194.127,10.302) 194.164,10.265 194.385,10.265 194.497,10.153 196.601,8.049 197.949,8.049 198.636,7.361 212.532,7.361 213.146,7.975 213.146,8.148 213.498,8.5 J14.D3@213.739,8.5
  Bottom Layer w0.095: v1(70.099,28.624) 70.122,28.6 70.425,28.6 70.608,28.417 70.608,19.839 74.531,15.916 94.856,15.916 100.593,10.179 108.045,10.179 108.101,10.124 108.101,10.095 108.32,9.875 108.63,9.875 108.818,10.063 109.395,10.063 109.732,10.4 112.227,10.4 112.524,10.102 114.106,10.102 114.678,10.675 117.95,10.675 118.225,10.95 124.248,10.95 125.298,9.9 127.923,9.9 129.289,8.533 130.864,8.533 131.7,7.698 131.7,7.364 132.269,6.795 135.595,6.795 136.325,7.525 137.752,7.525 138.186,7.958 157.483,7.958 163.025,13.5 191.113,13.5 193.501,11.112 194.072,10.541 194.072,10.357 v1(194.127,10.302)
SLOT1.LVDS_2_N: IC6.V21 J14.C4 | length 174.3
  Top Layer w0.095: v1(71.909,38.81) IC6.V21@72.309,39.21
  Layer 1 w0.102: v1(71.909,38.81) 71.857,38.758 71.857,38.468 71.493,38.103 71.493,37.795 70.936,37.239 70.936,26.228 72.735,24.429 72.735,24.024 72.676,23.964 72.558,23.964 v1(72.349,24.173) ; v1(198.436,10.836) 198.473,10.799 198.473,10.577 198.72,10.33 199.475,9.575 215.343,9.575 215.832,10.064 215.832,10.148 215.48,10.5 J14.C4@215.239,10.5
  Bottom Layer w0.095: v1(72.349,24.173) 72.376,24.173 72.558,23.991 72.763,23.991 73.175,23.578 73.175,21.225 76.342,18.058 83.126,18.058 83.234,18.166 83.766,18.166 83.874,18.058 96.967,18.058 101.287,13.738 110.567,13.738 110.667,13.639 116.903,13.639 117.121,13.857 118.005,13.857 118.47,13.392 123.592,13.392 123.6,13.4 129.777,13.4 132.761,10.416 132.954,10.416 133.595,9.775 135.248,9.775 141.265,15.792 193.296,15.792 198.197,10.891 198.381,10.891 v1(198.436,10.836)
SLOT1.LVDS_2_P: IC6.W23 J14.B4 | length 174.1
  Top Layer w0.095: IC6.W23@71.541,37.59 v1(71.941,37.99)
  Layer 1 w0.102: v1(71.941,37.99) 71.887,37.99 71.707,37.81 71.707,37.707 71.15,37.15 71.15,26.317 72.949,24.518 72.949,23.935 72.764,23.751 72.558,23.751 v1(72.349,23.542) ; v1(198.063,10.463) 198.1,10.426 198.321,10.426 198.506,10.241 199.386,9.361 215.432,9.361 216.046,9.975 216.046,10.148 216.398,10.5 J14.B4@216.639,10.5
  Bottom Layer w0.095: v1(72.349,23.542) 72.376,23.542 72.558,23.724 72.652,23.724 72.908,23.468 72.908,21.114 76.231,17.791 83.237,17.791 83.345,17.899 83.655,17.899 83.763,17.791 96.856,17.791 101.176,13.471 110.457,13.471 110.556,13.372 117.013,13.372 117.231,13.59 117.895,13.59 118.359,13.125 123.702,13.125 123.711,13.134 129.666,13.134 132.65,10.15 132.844,10.15 133.484,9.509 135.359,9.509 141.375,15.525 193.185,15.525 198.008,10.702 198.008,10.518 v1(198.063,10.463)
SLOT1.LVDS_3_N: J14.I4 R85.1 R88.2 | length 158.2
  Bottom Layer w0.095: R85.1@71.308,30.817 R85.1@71.288,30.817 ; R88.2@71.389,31.619 71.389,31.599 71.227,31.436 71.181,31.436 71.111,31.367 71.111,31.035 71.125,31.021 71.125,30.979 R85.1@71.288,30.817 ; J14.I4@206.839,10.5 207.026,10.5 207.405,10.121 207.405,10.042 207.013,9.65 201.08,9.65 201.055,9.626 197.125,9.626 191.833,14.917 161.85,14.917 161.3,14.367 141.615,14.367 135.69,8.442 134.508,8.442 133.85,9.1 132.358,9.1 132,9.458 132,9.911 131.214,10.697 129.003,10.697 127.609,12.091 127.393,12.307 122.45,12.307 100.818,12.307 96.017,17.108 75.517,17.108 71.975,20.65 71.975,28.725 71.449,29.251 71.111,29.589 71.111,30.598 71.125,30.613 71.125,30.654 R85.1@71.288,30.817
SLOT1.LVDS_3_P: J14.H4 R84.2 R85.2 | length 159.1
  Bottom Layer w0.095: R84.2@70.596,31.625 70.596,31.605 70.759,31.442 70.789,31.442 70.844,31.387 70.844,31.035 70.83,31.021 70.83,30.979 R85.2@70.668,30.817 ; R85.2@70.648,30.817 R85.2@70.668,30.817 ; 134.233,8.339 133.739,8.834 132.247,8.834 131.733,9.348 131.733,9.8 131.103,10.43 128.893,10.43 127.499,11.824 127.283,12.04 100.708,12.04 95.906,16.841 75.406,16.841 71.708,20.539 71.708,28.614 71.338,28.984 70.844,29.478 70.844,30.598 70.83,30.613 70.83,30.654 R85.2@70.668,30.817 ; 134.252,8.321 134.397,8.175 135.8,8.175 141.725,14.1 161.411,14.1 161.961,14.65 191.723,14.65 197.014,9.359 201.166,9.359 201.19,9.383 207.124,9.383 207.672,9.931 207.672,10.121 208.051,10.5 J14.H4@208.239,10.5
SLOT1.LVDS_4_N: IC6.W26 J14.L4 | length 154.5
  Top Layer w0.095: IC6.W26@71.516,35.184 71.699,35.001 71.699,33.77 71.622,33.693 71.622,26.178 74.028,23.772 74.028,22.908 73.898,22.778 v1(73.898,22.7)
  Int2 (Sign) w0.102: v1(199.798,10.15) 199.798,10.202 199.955,10.359 199.955,10.58 200.139,10.765 200.837,10.765 201.011,10.592 201.383,10.592 202.177,9.798 202.966,9.798 203.232,10.064 203.232,10.148 202.88,10.5 J14.L4@202.639,10.5
  Bottom Layer w0.095: v1(73.898,22.7) 73.898,22.622 74.028,22.492 74.028,21.645 76.881,18.791 97.367,18.791 101.334,14.824 104.705,14.824 104.79,14.739 111.66,14.739 111.929,15.008 114.703,15.008 115.195,15.5 116.4,15.5 116.92,14.98 117.697,14.98 118.219,14.458 120.206,14.458 120.431,14.233 122.483,14.233 122.918,14.668 123.255,14.668 123.465,14.458 138.133,14.458 140.2,16.525 142.05,16.525 193.81,16.525 197.405,12.93 197.439,12.896 198.105,12.231 cw(c197.987,12.113) 198.105,11.995 198.09,11.98 ccw(c198.207,11.862) 198.09,11.745 ccw(c198.207,11.862) 198.325,11.745 198.34,11.76 cw(c198.458,11.642) 198.576,11.76 cw(c198.458,11.642) 198.576,11.524 198.544,11.493 ccw(c198.662,11.375) 198.544,11.257 ccw(c198.662,11.375) 198.779,11.257 198.811,11.289 cw(c198.929,11.171) 199.046,11.289 199.08,11.255 199.748,10.587 199.872,10.587 199.928,10.532 199.928,10.358 199.798,10.228 v1(199.798,10.15)
SLOT1.LVDS_4_P: IC6.V24 J14.K4 | length 155.3
  Top Layer w0.095: IC6.V24@72.315,36.784 71.874,36.343 71.874,35.203 71.965,35.111 71.965,33.659 71.889,33.582 71.889,26.289 74.295,23.882 74.295,22.908 74.425,22.778 v1(74.425,22.7)
  Int2 (Sign) w0.102: v1(200.325,10.15) 200.325,10.202 200.168,10.359 200.168,10.492 200.228,10.551 200.749,10.551 200.922,10.378 201.295,10.378 202.089,9.584 203.054,9.584 203.446,9.975 203.446,10.148 203.798,10.5 J14.K4@204.039,10.5
  Bottom Layer w0.095: v1(74.425,22.7) 74.425,22.622 74.295,22.492 74.295,21.755 76.992,19.058 97.477,19.058 101.444,15.091 104.816,15.091 104.901,15.006 111.55,15.006 111.819,15.275 114.593,15.275 115.084,15.767 116.51,15.767 117.03,15.247 117.808,15.247 118.329,14.725 120.317,14.725 120.542,14.5 122.373,14.5 122.808,14.935 123.366,14.935 123.576,14.725 138.023,14.725 140.089,16.792 142.05,16.792 193.921,16.792 199.858,10.854 199.983,10.854 200.195,10.642 200.195,10.358 200.325,10.228 v1(200.325,10.15)
SLOT1.LVDS_5_N: IC6.U25 J14.H5 | length 156.7
  Top Layer w0.095: IC6.U25@73.115,35.984 73.095,35.964 73.095,35.695 72.681,35.281 72.681,35.15 72.72,35.111 72.72,34.389 72.689,34.357 72.689,28.261 73.047,27.903 73.047,27.358 73.177,27.228 v1(73.177,27.15)
  Bottom Layer w0.095: v1(73.177,27.15) 73.177,27.072 73.047,26.942 73.047,26.742 72.82,26.515 72.82,25.83 74.708,23.942 75.858,23.942 78.692,21.108 98.842,21.108 102.058,17.892 111.445,17.892 111.784,18.231 112.316,18.231 113.14,17.407 117.255,17.407 117.39,17.542 121.958,17.542 122.975,16.525 123.725,16.525 124.1,16.9 125.725,16.9 126.05,17.225 130.15,17.225 130.55,17.625 135.898,17.625 137.148,18.875 195.45,18.875 198.808,15.517 199.983,15.517 201.667,13.833 201.667,12.211 202.227,11.65 208.313,11.65 208.705,12.042 208.705,12.121 208.326,12.5 J14.H5@208.139,12.5
SLOT1.LVDS_5_P: IC6.V26 J14.G5 | length 156.7
  Top Layer w0.095: IC6.V26@72.315,35.184 72.315,35.139 72.453,35.001 72.453,34.499 72.422,34.468 72.422,28.151 72.78,27.793 72.78,27.358 72.65,27.228 v1(72.65,27.15)
  Bottom Layer w0.095: v1(72.65,27.15) 72.65,27.072 72.78,26.942 72.78,26.853 72.553,26.626 72.553,25.72 74.598,23.675 75.748,23.675 78.581,20.841 98.731,20.841 101.948,17.625 111.556,17.625 111.895,17.964 112.205,17.964 113.029,17.14 117.365,17.14 117.5,17.275 121.848,17.275 122.864,16.258 123.836,16.258 124.211,16.633 125.836,16.633 126.161,16.958 130.261,16.958 130.661,17.358 136.008,17.358 137.258,18.608 195.34,18.608 198.698,15.25 199.873,15.25 201.4,13.723 201.4,12.1 202.117,11.383 208.424,11.383 208.972,11.931 208.972,12.121 209.351,12.5 J14.G5@209.539,12.5
SLOT1.LVDS_6_N: IC6.U22 J14.K5 | length 155.6
  Top Layer w0.095: v1(72.675,38) 72.703,38 73.087,38.384 IC6.U22@73.09,38.384
  Int2 (Sign) w0.102: v1(200.739,11.807) 200.791,11.807 200.947,11.65 204.118,11.65 204.532,12.064 204.532,12.148 204.18,12.5 J14.K5@203.939,12.5
  Layer 1 w0.102: v1(72.675,38) 72.312,37.637 72.312,37.089 72.332,37.069 72.332,36.739 72.123,36.529 72.123,35.813 72.089,35.779 72.089,27.848 72.022,27.781 72.022,27.003 73.75,25.275 73.75,24.728 75.7,22.778 75.7,22.079 75.842,21.937 76.063,21.937 v1(76.1,21.9)
  Bottom Layer w0.095: v1(76.1,21.9) 76.155,21.845 76.155,21.661 77.683,20.133 98.117,20.133 102.124,16.126 109.179,16.126 109.545,16.492 121.061,16.492 122.077,15.475 122.405,15.475 122.621,15.692 123.992,15.692 124.3,16 129.802,16 130.294,16.492 131.008,16.492 131.686,15.814 136.811,15.814 138.898,17.9 194.275,17.9 200.301,11.874 200.301,11.806 200.43,11.676 200.53,11.676 200.661,11.807 v1(200.739,11.807)
SLOT1.LVDS_6_P: IC6.V23 J14.J5 | length 155.4
  Top Layer w0.095: v1(71.909,37.185) IC6.V23@72.309,37.585
  Int2 (Sign) w0.102: v1(200.739,11.28) 200.791,11.28 200.947,11.436 204.207,11.436 204.746,11.975 204.746,12.148 205.098,12.5 J14.J5@205.339,12.5
  Layer 1 w0.102: v1(71.909,37.185) 71.913,37.185 72.118,36.98 72.118,36.827 71.909,36.618 71.909,35.901 71.875,35.867 71.875,27.937 71.808,27.87 71.808,26.914 73.536,25.186 73.536,24.639 75.486,22.689 75.486,21.99 75.69,21.786 75.69,21.564 v1(75.727,21.527)
  Bottom Layer w0.095: v1(75.727,21.527) 75.783,21.472 75.967,21.472 77.572,19.866 98.006,19.866 102.013,15.859 109.29,15.859 109.655,16.225 120.95,16.225 121.967,15.208 122.515,15.208 122.732,15.425 124.102,15.425 124.411,15.733 129.913,15.733 130.405,16.225 130.898,16.225 131.576,15.547 136.922,15.547 139.008,17.633 194.165,17.633 200.034,11.763 200.034,11.695 200.32,11.41 200.53,11.41 200.661,11.28 v1(200.739,11.28)
SLOT1.LVDS_7_N: IC6.U24 J14.C6 | length 162.5
  Top Layer w0.095: v1(72.71,37.216) IC6.U24@73.11,36.816
  Bottom Layer w0.095: v1(72.71,37.216) 72.301,36.806 72.301,36.205 72.095,35.999 72.095,33.695 71.85,33.45 71.85,29.698 73.548,28 73.605,28 73.858,27.746 73.858,25.856 75.039,24.675 76.498,24.675 79.364,21.808 99.589,21.808 101.889,19.508 111.816,19.508 111.859,19.552 112.288,19.552 112.437,19.403 115.542,19.403 116.187,18.758 122.542,18.758 123.419,17.881 123.991,17.881 124.492,18.383 125.169,18.383 125.935,19.15 127.598,19.15 128.311,18.437 135.387,18.437 136.608,19.658 196.265,19.658 199.698,16.225 213.702,16.225 214.64,15.287 215.476,15.287 215.805,14.958 215.805,14.879 215.426,14.5 J14.C6@215.239,14.5
SLOT1.LVDS_7_P: IC6.T24 J14.B6 | length 162.3
  Top Layer w0.095: v1(73.45,36.375) 73.474,36.375 IC6.T24@73.884,36.785
  Bottom Layer w0.095: v1(73.45,36.375) 73.026,35.95 72.52,35.95 72.511,35.959 72.432,35.959 72.362,35.888 72.362,33.584 72.117,33.339 72.117,29.808 73.659,28.266 73.716,28.266 74.125,27.857 74.125,25.967 75.15,24.942 76.608,24.942 79.475,22.075 99.7,22.075 102,19.775 111.705,19.775 111.748,19.818 112.399,19.818 112.547,19.669 115.653,19.669 116.297,19.025 122.652,19.025 123.529,18.148 123.88,18.148 124.382,18.65 125.058,18.65 125.825,19.417 127.708,19.417 128.422,18.703 135.276,18.703 136.498,19.925 196.375,19.925 199.808,16.492 213.813,16.492 214.75,15.554 215.586,15.554 216.072,15.068 216.072,14.879 216.451,14.5 J14.B6@216.639,14.5
SLOT1.LVDS_8_N: IC7A.48 J14.F6 R166A.2 | length 85.4
  Top Layer w0.095: IC7A.48@133.825,5.356 133.825,5.015 133.708,4.898 133.708,4.728 133.732,4.704 133.732,4.459 133.788,4.404 133.827,4.404 133.896,4.335 R166A.2@133.896,3.948 ; R166A.2@133.896,3.9 R166A.2@133.896,3.948 ; R166A.2@134.069,4.141 134.069,4.121 R166A.2@133.896,3.948 ; J14.F6@211.039,14.5 211.226,14.5 211.605,14.121 211.605,14.042 211.055,13.491 202.016,13.491 201.45,12.925 200.445,12.925 200.429,12.942 199.667,12.942 198.95,12.225 175.373,12.225 172.468,9.32 164.418,9.32 161.586,6.489 142.239,6.489 139.217,3.467 133.954,3.467 133.732,3.689 133.732,3.823 133.788,3.879 133.827,3.879 R166A.2@133.896,3.948
SLOT1.LVDS_8_P: IC7A.47 J14.E6 R166A.1 | length 86.1
  Top Layer w0.095: IC7A.47@133.325,5.356 133.325,5.015 133.442,4.898 133.442,4.618 133.466,4.594 133.466,4.459 133.41,4.404 133.372,4.404 133.129,4.161 R166A.1@133.129,4.141 133.129,4.121 133.372,3.879 133.41,3.879 133.466,3.823 133.466,3.578 133.844,3.2 139.327,3.2 142.349,6.222 161.697,6.222 164.529,9.054 172.579,9.054 175.483,11.958 199.061,11.958 199.777,12.675 200.318,12.675 200.334,12.659 201.561,12.659 202.127,13.224 211.165,13.224 211.872,13.931 211.872,14.121 212.251,14.5 J14.E6@212.439,14.5
SLOT1.LVDS_9_N: IC7A.4 J14.I6 R168A.2 | length 77
  Top Layer w0.095: IC7A.4@134.525,7.556 134.867,7.556 134.983,7.44 135.222,7.44 135.226,7.444 135.559,7.444 135.615,7.5 135.615,7.538 135.857,7.781 R168A.2@135.877,7.781 135.897,7.781 136.14,7.538 136.14,7.5 136.195,7.444 140.319,7.444 141.342,8.467 162.017,8.467 163.892,10.342 171.067,10.342 174.422,13.697 200.392,13.697 200.522,13.827 v1(200.6,13.827)
  Int2 (Sign) w0.102: v1(200.6,13.827) 200.652,13.827 200.809,13.67 203.794,13.67 203.896,13.772 207.14,13.772 207.432,14.064 207.432,14.148 207.08,14.5 J14.I6@206.839,14.5
SLOT1.LVDS_9_P: IC7A.3 J14.H6 R168A.1 | length 77.3
  Top Layer w0.095: IC7A.3@134.525,7.056 134.867,7.056 134.983,7.173 135.332,7.173 135.337,7.177 135.559,7.177 135.615,7.122 135.615,7.083 135.857,6.841 R168A.1@135.877,6.841 135.897,6.841 136.14,7.083 136.14,7.122 136.195,7.177 140.43,7.177 141.452,8.2 162.127,8.2 164.002,10.075 171.177,10.075 174.532,13.43 200.392,13.43 200.522,13.3 v1(200.6,13.3)
  Int2 (Sign) w0.102: v1(200.6,13.3) 200.652,13.3 200.809,13.457 203.883,13.457 203.985,13.558 207.229,13.558 207.646,13.975 207.646,14.148 207.998,14.5 J14.H6@208.239,14.5
SLOT1.LVDS_10_N: IC7A.10 J14.L6 R170A.2 | length 70.9
  Top Layer w0.095: IC7A.10@134.525,10.556 134.867,10.556 134.983,10.44 135.228,10.44 135.26,10.408 135.554,10.408 135.609,10.463 135.609,10.502 135.852,10.744 R170A.2@135.872,10.744 135.892,10.744 136.134,10.502 136.134,10.463 136.19,10.408 160.558,10.408 164.942,14.792 200.761,14.792 201.572,13.98 202.258,13.98 202.639,14.361 J14.L6@202.639,14.5
SLOT1.LVDS_10_P: IC7A.9 J14.K6 R170A.1 | length 72.4
  Top Layer w0.095: IC7A.9@134.525,10.056 134.867,10.056 134.983,10.173 135.118,10.173 135.15,10.141 135.554,10.141 135.609,10.085 135.609,10.047 135.852,9.804 R170A.1@135.872,9.804 135.892,9.804 136.134,10.047 136.134,10.085 136.19,10.141 160.668,10.141 165.052,14.525 200.65,14.525 201.462,13.713 203.019,13.713 203.806,14.5 J14.K6@204.039,14.5